# EAGLE board untitled (EAGLE 5.06)
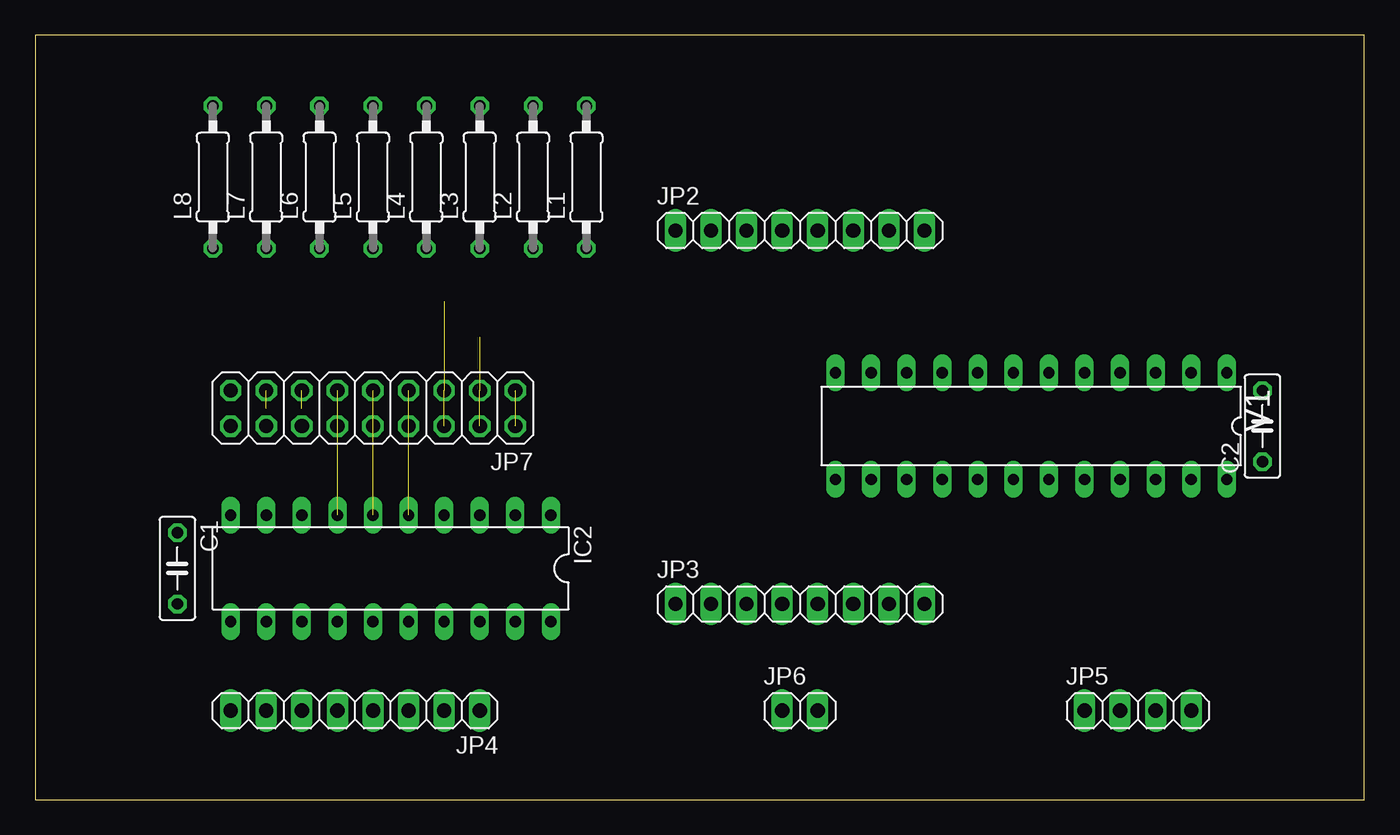
[diagram p0: board, top side]
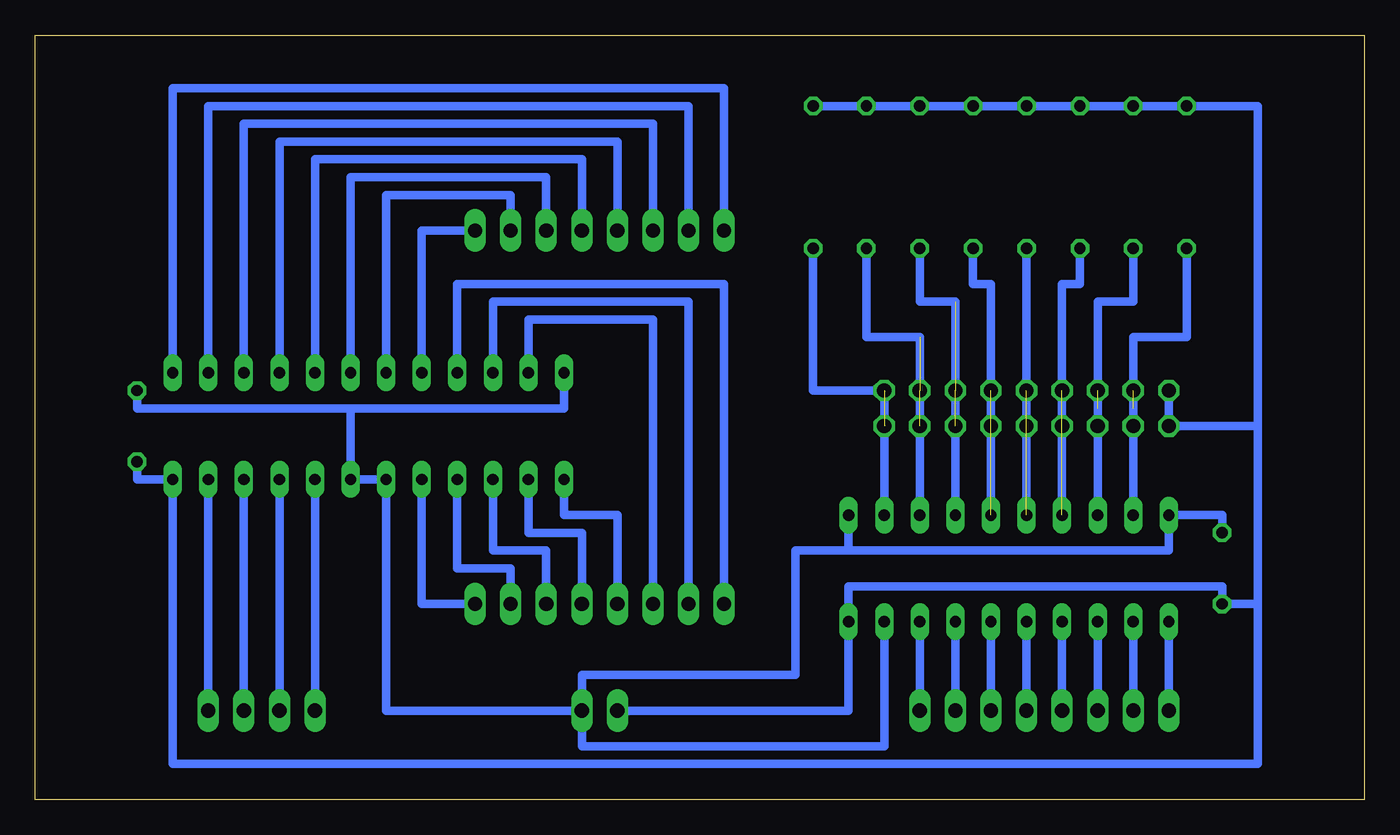
[diagram p1: board, bottom side, seen from below]

Size 94.92 x 54.6 mm. Coordinates in mm from the lower left corner, seen from the top.
Outline: 0,0 94.92,0 94.92,54.6 0,54.6 0,0
Copper layers (1*16): Top 0.035mm / dielectric 1.5mm / Bottom 0.035mm
Design rules "default": minimum track width 10mil, minimum drill 24mil, track to track 8mil, track to pad 8mil, pad to pad 8mil, via to via 8mil, smd to smd 8mil, copper to edge 40mil, drill to drill 8mil, minimum pad ring 10mil, minimum via ring 8mil, stop-mask expansion 4mil, vias tented up to drill 0mil, thermal gap 10mil

## Footprints (pad centres in the part's own frame; a part is rotated, then mirrored left to right if it is on the bottom)
C050-025X075 = drill 0.813 octagon: 1 -2.54,0; 2 2.54,0
DIL20 = drill 0.813 long: 1 -11.43,-3.81; 2 -8.89,-3.81; 3 -6.35,-3.81; 4 -3.81,-3.81; 5 -1.27,-3.81; 6 1.27,-3.81; 7 3.81,-3.81; 8 6.35,-3.81; 9 8.89,-3.81; 10 11.43,-3.81; 11 11.43,3.81; 12 8.89,3.81; 13 6.35,3.81; 14 3.81,3.81; 15 1.27,3.81; 16 -1.27,3.81; 17 -3.81,3.81; 18 -6.35,3.81; 19 -8.89,3.81; 20 -11.43,3.81
1X08 = drill 1.016 long: 1 -8.89,0; 2 -6.35,0; 3 -3.81,0; 4 -1.27,0; 5 1.27,0; 6 3.81,0; 7 6.35,0; 8 8.89,0
1X04 = drill 1.016 long: 1 -3.81,0; 2 -1.27,0; 3 1.27,0; 4 3.81,0
1X02 = drill 1.016 long: 1 -1.27,0; 2 1.27,0
2X09 = drill 1.016 octagon: 1 -10.16,-1.27; 2 -10.16,1.27; 3 -7.62,-1.27; 4 -7.62,1.27; 5 -5.08,-1.27; 6 -5.08,1.27; 7 -2.54,-1.27; 8 -2.54,1.27; 9 0,-1.27; 10 0,1.27; 11 2.54,-1.27; 12 2.54,1.27; 13 5.08,-1.27; 14 5.08,1.27; 15 7.62,-1.27; 16 7.62,1.27; 17 10.16,-1.27; 18 10.16,1.27
0207/10 = drill 0.813 octagon: 1 -5.08,0; 2 5.08,0
DIL24-3 = drill 0.813 long: 1 -13.97,-3.81; 2 -11.43,-3.81; 3 -8.89,-3.81; 4 -6.35,-3.81; 5 -3.81,-3.81; 6 -1.27,-3.81; 7 1.27,-3.81; 8 3.81,-3.81; 9 6.35,-3.81; 10 8.89,-3.81; 11 11.43,-3.81; 12 13.97,-3.81; 13 13.97,3.81; 14 11.43,3.81; 15 8.89,3.81; 16 6.35,3.81; 17 3.81,3.81; 18 1.27,3.81; 19 -1.27,3.81; 20 -3.81,3.81; 21 -6.35,3.81; 22 -8.89,3.81; 23 -11.43,3.81; 24 -13.97,3.81

## Placement (x,y rotation side)
C1  [C050-025X075]  10.16,16.51 270 top
C2  [C050-025X075]  87.63,26.67 90 top
IC2  74HC540N  [DIL20]  25.4,16.51 180 top
JP2  [1X08]  54.61,40.64 0 top
JP3  [1X08]  54.61,13.97 0 top
JP4  [1X08]  22.86,6.35 180 top
JP5  [1X04]  78.74,6.35 0 top
JP6  [1X02]  54.61,6.35 0 top
JP7  [2X09]  24.13,27.94 180 top
L1  [0207/10]  39.37,44.45 90 top
L2  [0207/10]  35.56,44.45 90 top
L3  [0207/10]  31.75,44.45 90 top
L4  [0207/10]  27.94,44.45 90 top
L5  [0207/10]  24.13,44.45 90 top
L6  [0207/10]  20.32,44.45 90 top
L7  [0207/10]  16.51,44.45 90 top
L8  [0207/10]  12.7,44.45 90 top
V1  74154N  [DIL24-3]  71.12,26.67 180 top

## Library data of the parts
C1 C2 L1-L8 = resistor
IC2 = 74xx-eu
JP2-JP7 = pinhead
V1 = 74ttl-din

## Nets
0V: C1.1 C2.2 IC2.1 IC2.19 JP6.2 V1.12 V1.18 V1.19
+UB: V1.24
GND: IC2.10
N$1: JP5.4 V1.23
N$2: JP5.3 V1.22
N$3: JP5.2 V1.21
N$4: JP5.1 V1.20
N$5: JP2.1 V1.1
N$6: JP2.2 V1.2
N$7: JP2.3 V1.3
N$8: JP2.4 V1.4
N$9: JP2.5 V1.5
N$10: JP2.6 V1.6
N$11: JP2.7 V1.7
N$12: JP2.8 V1.8
N$13: JP3.1 V1.9
N$14: JP3.2 V1.10
N$15: JP3.3 V1.11
N$16: JP3.4 V1.13
N$17: JP3.5 V1.14
N$18: JP3.6 V1.15
N$19: JP3.7 V1.16
N$20: JP3.8 V1.17
N$22: IC2.2 JP7.1 JP7.2 L1.1
N$23: IC2.3 JP7.3 JP7.4 L2.1
N$24: IC2.5 JP7.7 JP7.8 L4.1
N$25: IC2.6 JP7.9 JP7.10 L5.1
N$26: IC2.7 JP7.11 JP7.12 L6.1
N$27: IC2.8 JP7.13 JP7.14 L7.1
N$28: IC2.9 JP7.15 JP7.16 L8.1
N$29: IC2.18 JP4.1
N$30: IC2.17 JP4.2
N$31: IC2.16 JP4.3
N$32: IC2.15 JP4.4
N$33: IC2.14 JP4.5
N$34: IC2.13 JP4.6
N$35: IC2.12 JP4.7
N$36: IC2.11 JP4.8
N$38: IC2.4 JP7.5 JP7.6 L3.1
VCC: C1.2 C2.1 IC2.20 JP6.1 JP7.17 JP7.18 L1.2 L2.2 L3.2 L4.2 L5.2 L6.2 L7.2 L8.2

## Tracks (layer width: path | path; a pad name or v marks a point on that pad's centre or on a via)
0V
  Bottom 0.61: JP6.2 69.85,6.35 V1.18 V1.19 72.39,27.94 | 36.83,17.78 IC2.1 | 36.83,17.78 13.97,17.78 13.97,20.32 10.16,20.32 C1.1 | IC2.19 34.29,3.81 55.88,3.81 JP6.2 | 36.83,17.78 40.64,17.78 40.64,8.89 55.88,8.89 JP6.2 | C2.2 87.63,27.94 72.39,27.94 | 72.39,27.94 57.15,27.94 V1.12
N$1
  Bottom 0.61: JP5.4 V1.23
N$2
  Bottom 0.61: JP5.3 V1.22
N$3
  Bottom 0.61: JP5.2 V1.21
N$4
  Bottom 0.61: JP5.1 V1.20
N$5
  Bottom 0.61: V1.1 85.09,50.8 45.72,50.8 JP2.1
N$6
  Bottom 0.61: V1.2 82.55,49.53 48.26,49.53 JP2.2
N$7
  Bottom 0.61: JP2.3 50.8,48.26 80.01,48.26 V1.3
N$8
  Bottom 0.61: JP2.4 53.34,46.99 77.47,46.99 V1.4
N$9
  Bottom 0.61: JP2.5 55.88,45.72 74.93,45.72 V1.5
N$10
  Bottom 0.61: V1.6 72.39,44.45 58.42,44.45 JP2.6
N$11
  Bottom 0.61: JP2.7 60.96,43.18 69.85,43.18 V1.7
N$12
  Bottom 0.61: JP2.8 67.31,40.64 V1.8
N$13
  Bottom 0.61: V1.9 64.77,36.83 45.72,36.83 JP3.1
N$14
  Bottom 0.61: V1.10 62.23,35.56 48.26,35.56 JP3.2
N$15
  Bottom 0.61: V1.11 59.69,34.29 50.8,34.29 JP3.3
N$16
  Bottom 0.61: V1.13 57.15,20.32 53.34,20.32 JP3.4
N$17
  Bottom 0.61: V1.14 59.69,19.05 55.88,19.05 JP3.5
N$18
  Bottom 0.61: V1.15 62.23,17.78 58.42,17.78 JP3.6
N$19
  Bottom 0.61: JP3.7 60.96,16.51 64.77,16.51 V1.16
N$20
  Bottom 0.61: V1.17 67.31,13.97 JP3.8
N$22  (1 unrouted)
  Bottom 0.61: L1.1 39.37,30.48 39.37,29.21 JP7.1 IC2.2
N$23  (2 unrouted)
  Bottom 0.61: L2.1 35.56,33.02 31.75,33.02 IC2.3
N$24  (2 unrouted)
  Bottom 0.61: L4.1 27.94,36.83 26.67,36.83 IC2.5
N$25  (2 unrouted)
  Bottom 0.61: IC2.6 L5.1
N$26  (2 unrouted)
  Bottom 0.61: L6.1 20.32,36.83 21.59,36.83 IC2.7
N$27  (1 unrouted)
  Bottom 0.61: L7.1 16.51,35.56 19.05,35.56 19.05,27.94 JP7.14 IC2.8
N$28  (1 unrouted)
  Bottom 0.61: L8.1 12.7,33.02 16.51,33.02 16.51,27.94 JP7.16 IC2.9
N$29
  Bottom 0.61: JP4.1 IC2.18
N$30
  Bottom 0.61: JP4.2 IC2.17
N$31
  Bottom 0.61: JP4.3 IC2.16
N$32
  Bottom 0.61: JP4.4 IC2.15
N$33
  Bottom 0.61: JP4.5 IC2.14
N$34
  Bottom 0.61: JP4.6 IC2.13
N$35
  Bottom 0.61: JP4.7 IC2.12
N$36
  Bottom 0.61: JP4.8 IC2.11
N$38  (2 unrouted)
  Bottom 0.61: L3.1 31.75,35.56 29.21,35.56 IC2.4
VCC
  Bottom 0.61: JP6.1 36.83,6.35 IC2.20 36.83,15.24 10.16,15.24 C1.2 7.62,13.97 | JP7.17 JP7.18 7.62,26.67 | L6.2 17.78,49.53 | L6.2 L5.2 | L5.2 L4.2 29.21,49.53 | L3.2 L2.2 | L2.2 L1.2 | L6.2 L7.2 L8.2 7.62,49.53 7.62,26.67 | L3.2 L2.2 | 29.21,49.53 L3.2 | L5.2 29.21,49.53 | 7.62,13.97 7.62,2.54 85.09,2.54 85.09,22.86 87.63,22.86 C2.1 | 7.62,13.97 7.62,26.67